# EAGLE board Schematic_withShiftResister (EAGLE 8.4.0)
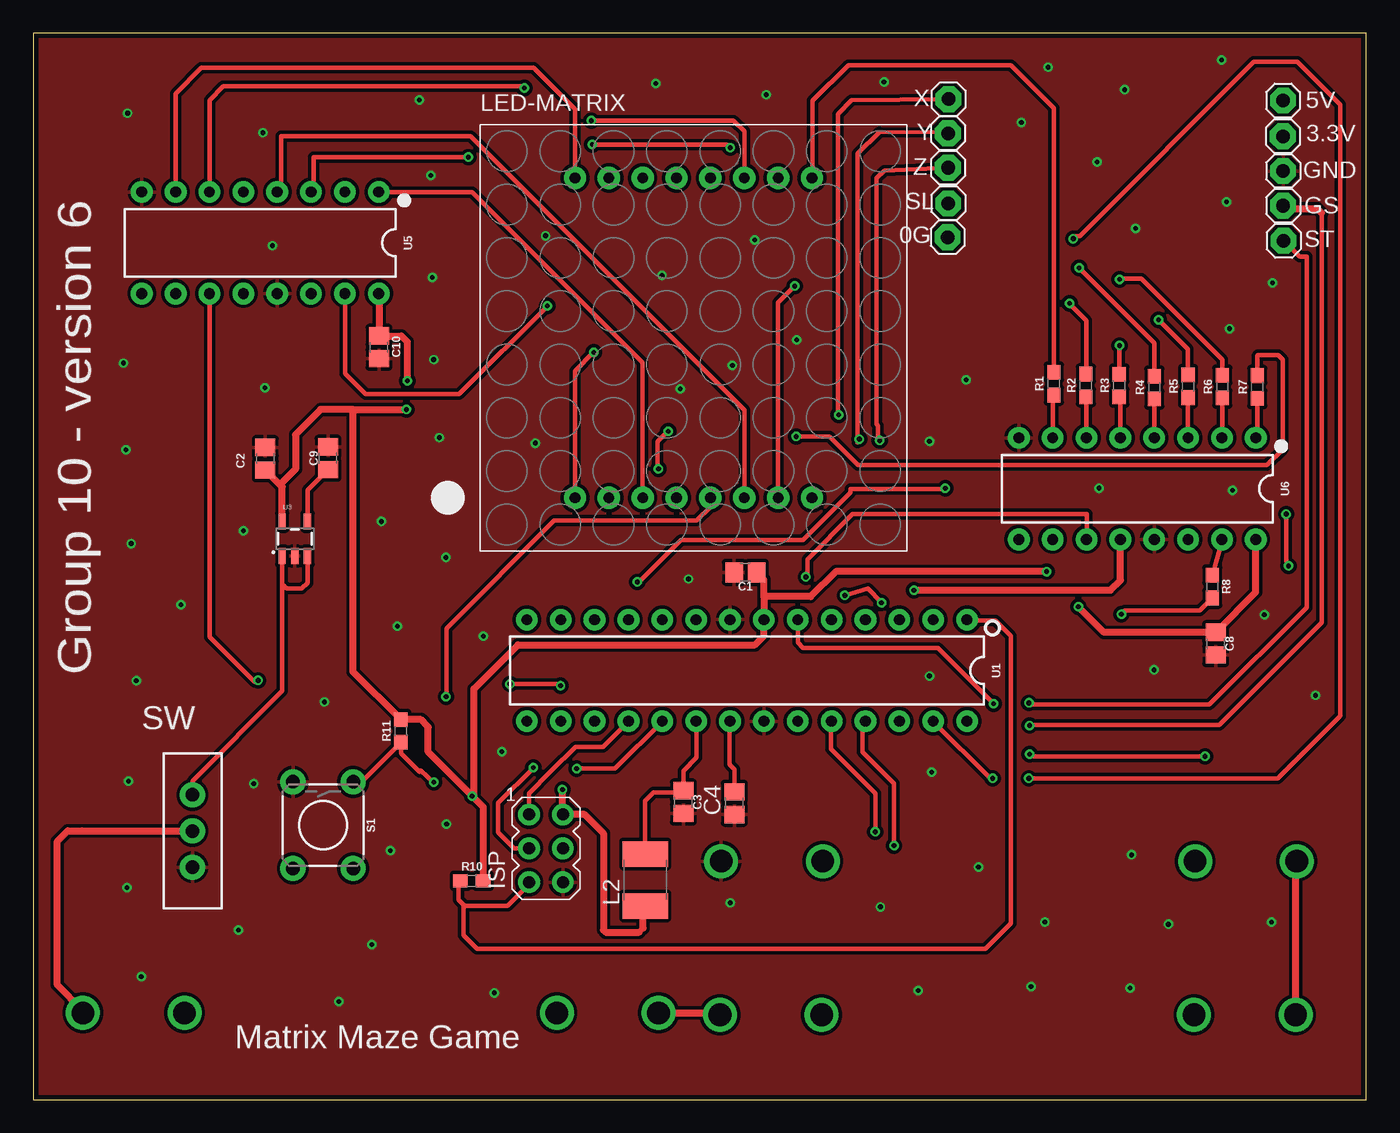
[diagram p0: board, top side]
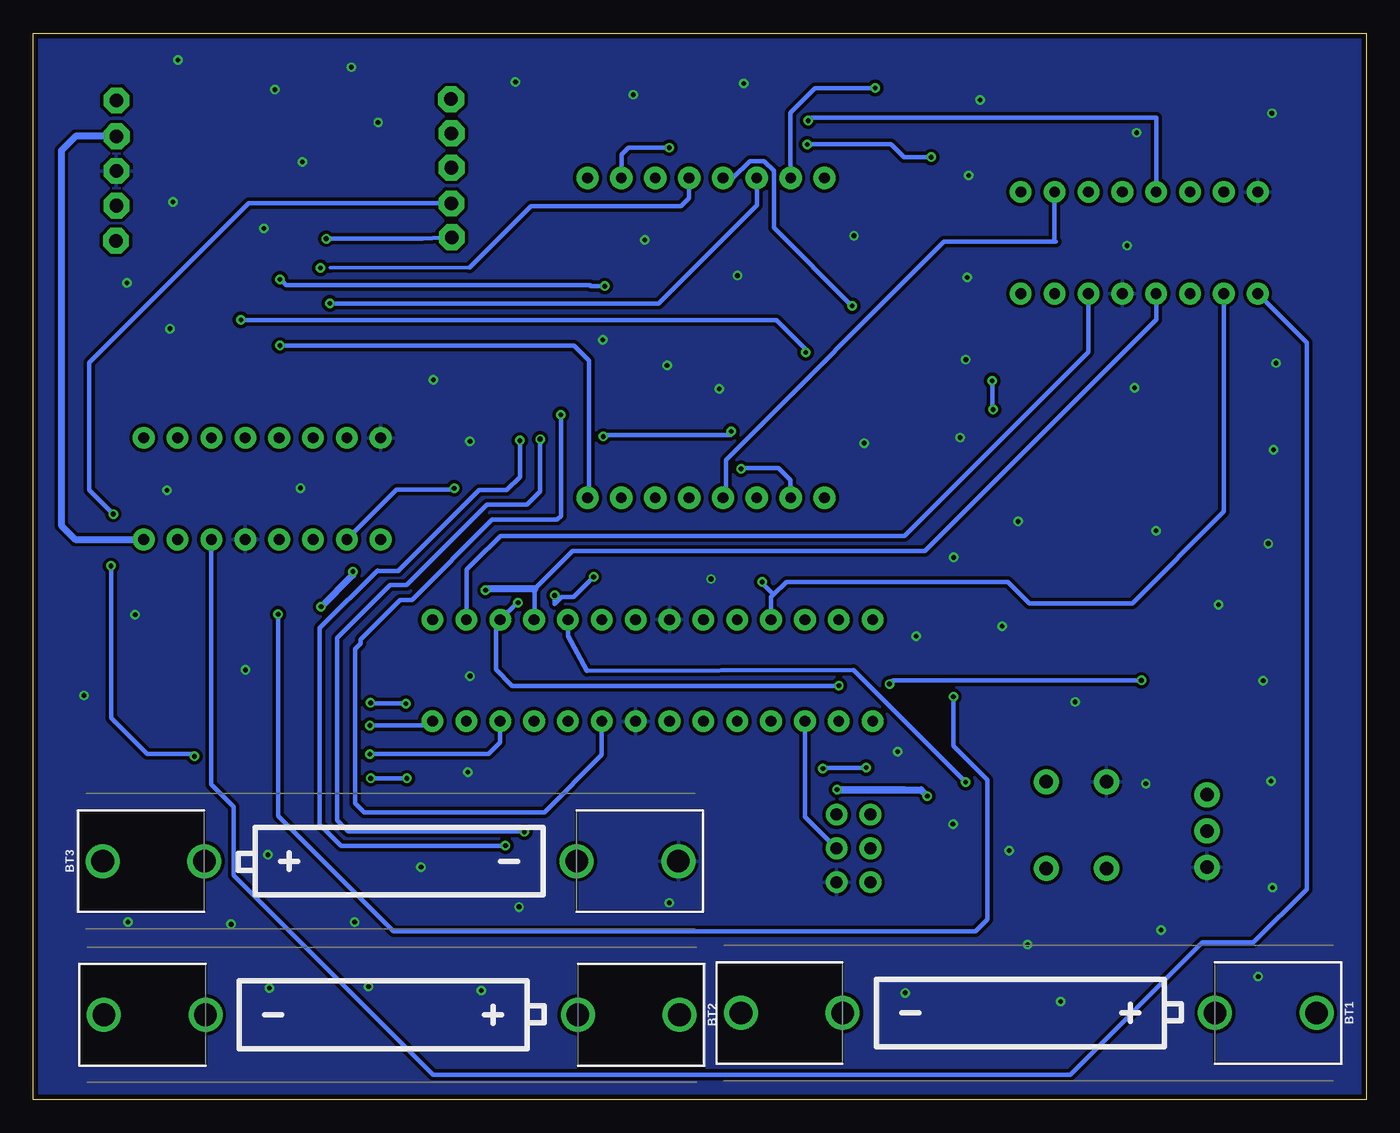
[diagram p1: board, bottom side, seen from below]

Size 100 x 80 mm. Coordinates in mm from the lower left corner, seen from the top.
Outline: 0,0 100,0 100,80 0,80 0,0
Copper layers (1*16): Top 0.0356mm / dielectric 1.5011mm / Bottom 0.0356mm
Design rules "osh-park-2-layers-design-rules": minimum track width 6mil, minimum drill 13mil, track to track 6mil, track to pad 6mil, pad to pad 6mil, via to via 6mil, smd to smd 6mil, copper to edge 15mil, drill to drill 6mil, minimum pad ring 7mil, minimum via ring 7mil, stop-mask expansion 3mil, vias tented up to drill 0mil, thermal gap 10mil
Net classes: 0 default: width 0.254 mm, drill 0.508 mm, clearance 0.254 mm

## Footprints (pad centres in the part's own frame; a part is rotated, then mirrored left to right if it is on the bottom)
1X01 = drill 1.016 pad 1.93 octagon: 1 0,0
BATTERY-AAA-KIT = drill 1.702: GND@1 21.59,0; GND@2 13.97,0; PWR@1 -21.59,0; PWR@2 -13.97,0
C0805 = smd 1.3 x 1.5: 1 -0.85,0; 2 0.85,0
AVRISP = drill 0.9 pad 1.626: 1 -1.27,2.54; 2 1.27,2.54; 3 -1.27,0; 4 1.27,0; 5 -1.27,-2.54; 6 1.27,-2.54
L1812 = smd 1.9 x 3.4: 1 -1.95,0; 2 1.95,0
SEGMENT_BL-M12A881UR = drill 0.8 pad 1.676: 1 -8.89,-12; 2 -6.35,-12; 3 -3.81,-12; 4 -1.27,-12; 5 1.27,-12; 6 3.81,-12; 7 6.35,-12; 8 8.89,-12; 9 8.89,12; 10 6.35,12; 11 3.81,12; 12 1.27,12; 13 -1.27,12; 14 -3.81,12; 15 -6.35,12; 16 -8.89,12
0603 = smd 1.1 x 1: 1 -0.85,0; 2 0.85,0
TACTILE_SWITCH_PTH_6.0MM = drill 1.016 pad 1.88: 1 -3.251,2.261; 2 3.251,2.261; 3 -3.251,-2.261; 4 3.251,-2.261
SWITCH-SPDT_LOCK.007S = drill 1.016 pad 1.88: 1 0,2.718; 2 0,0; 3 0,-2.718
DIP28 = drill 0.813 pad 1.626: 1 -16.51,-3.81; 2 -13.97,-3.81; 3 -11.43,-3.81; 4 -8.89,-3.81; 5 -6.35,-3.81; 6 -3.81,-3.81; 7 -1.27,-3.81; 8 1.27,-3.81; 9 3.81,-3.81; 10 6.35,-3.81; 11 8.89,-3.81; 12 11.43,-3.81; 13 13.97,-3.81; 14 16.51,-3.81; 15 16.51,3.81; 16 13.97,3.81; 17 11.43,3.81; 18 8.89,3.81; 19 6.35,3.81; 20 3.81,3.81; 21 1.27,3.81; 22 -1.27,3.81; 23 -3.81,3.81; 24 -6.35,3.81; 25 -8.89,3.81; 26 -11.43,3.81; 27 -13.97,3.81; 28 -16.51,3.81
SOT23-5 = smd 0.55 x 1.2: 1 -0.95,-1.3; 2 0,-1.3; 3 0.95,-1.3; 4 0.95,1.3; 5 -0.95,1.3
DIP16 = drill 0.813 pad 1.626: 1 -8.89,-3.81; 2 -6.35,-3.81; 3 -3.81,-3.81; 4 -1.27,-3.81; 5 1.27,-3.81; 6 3.81,-3.81; 7 6.35,-3.81; 8 8.89,-3.81; 9 8.89,3.81; 10 6.35,3.81; 11 3.81,3.81; 12 1.27,3.81; 13 -1.27,3.81; 14 -3.81,3.81; 15 -6.35,3.81; 16 -8.89,3.81

## Placement (x,y rotation side)
0G  [1X01]  68.6,64.7 0 top
3.3V  [1X01]  93.75,72.27 0 top
5V  [1X01]  93.76,74.95 0 top
BT1  [BATTERY-AAA-KIT]  25.31,6.5 180 bottom
BT2  [BATTERY-AAA-KIT]  73.11,6.36 180 bottom
BT3  [BATTERY-AAA-KIT]  73.2,17.89 0 bottom
C1  0.1uF  [C0805]  53.43,39.55 180 top
C2  2.2uF  [C0805]  17.41,48.08 90 top
C3  0.1uF  [C0805]  48.78,22.32 270 top
C4  0.1uF  [C0805]  52.6,22.23 90 top
C8  0.1uF  [C0805]  88.71,34.2 270 top
C9  470pF  [C0805]  22.11,48.12 90 top
C10  0.1uF  [C0805]  25.93,56.45 270 top
GND  [1X01]  93.77,69.67 0 top
GS  [1X01]  93.77,67.07 0 top
ISP  AVRISP-6  [AVRISP]  38.46,18.85 0 top
L2  10uH  [L1812]  45.91,16.47 90 top
LED-MATRIX  [SEGMENT_BL-M12A881UR]  49.53,57.15 0 top
R1  150  [0603]  76.56,53.71 90 top
R2  150  [0603]  78.96,53.58 90 top
R3  150  [0603]  81.47,53.57 90 top
R4  150  [0603]  84.11,53.42 90 top
R5  150  [0603]  86.64,53.52 90 top
R6  150  [0603]  89.21,53.49 90 top
R7  150  [0603]  91.83,53.46 90 top
R8  150  [0603]  88.45,38.48 270 top
R10  10k  [0603]  32.9,16.41 0 top
R11  10k  [0603]  27.58,27.65 90 top
S1  MOMENTARY-SWITCH-SPST-PTH-6.0MM  [TACTILE_SWITCH_PTH_6.0MM]  21.74,20.58 270 top
SL  [1X01]  68.65,67.24 0 top
ST  [1X01]  93.81,64.44 0 top
SW  [SWITCH-SPDT_LOCK.007S]  11.94,20.15 0 top
U1  328P  [DIP28]  53.54,32.19 180 top
U3  3.3V/150mA  [SOT23-5]  19.62,42.08 0 top
U5  SN74HC595N  [DIP16]  17.03,64.28 180 top
U6  SN74HC595N  [DIP16]  82.83,45.83 180 top
X  [1X01]  68.66,75.06 0 top
Y  [1X01]  68.62,72.5 0 top
Z  [1X01]  68.63,69.92 0 top

## Library data of the parts
0G 3.3V 5V C1-C4 C8-C10 GND GS SL ST X Y Z = adafruit
BT1-BT3 = SparkFun-Batteries; PROD_ID: BATT-08571; SF_SKU: PRT-12718
ISP LED-MATRIX = adafruit; OC_NEWARK: unknown
L2 = eagle-ltspice; OC_NEWARK: unknown; SPICEMODEL: NONE; SPICEPREFIX: L
R1-R8 = SparkFun-Resistors; PROD_ID: RES-11028
R10 R11 = SparkFun-Resistors; PROD_ID: RES-00824
S1 = SparkFun-Switches; OC_NEWARK: unknown; PROD_ID: SWCH-08441; SF_SKU: COM-00097
SW = SparkFun; OC_NEWARK: unknown
U1 = SparkFun-IC-Microcontroller; OC_NEWARK: unknown; PROD_ID: IC-09136
U3 = SparkFun-IC-Power; OC_NEWARK: unknown; PROD_ID: VREG-00822
U5 U6 = SparkFun-IC-Logic; PROD_ID: IC-13123

## Nets
3.3V: 3.3V.1 C1.1 C2.1 C8.1 C10.1 ISP.2 L2.1 R10.2 R11.2 U1.7 U3.5 U5.16 U6.16
GND: BT3.GND@1 C1.2 C2.2 C3.2 C4.1 C8.2 C9.2 C10.2 GND.1 ISP.6 S1.3 SW.3 U1.8 U1.22 U3.2 U5.8 U5.13 U6.8 U6.13
MISO: ISP.1 U1.18
MOSI: ISP.4 U1.17
N$1: LED-MATRIX.9 R1.2
N$2: LED-MATRIX.14 R2.2
N$3: LED-MATRIX.8 R3.2
N$4: LED-MATRIX.12
N$5: LED-MATRIX.1 R5.2
N$6: LED-MATRIX.7 R6.2
N$7: LED-MATRIX.2 R7.2
N$8: LED-MATRIX.5 R8.2
N$9: LED-MATRIX.13 U5.15
N$10: LED-MATRIX.4 U5.2
N$11: LED-MATRIX.10 U5.3
N$12: LED-MATRIX.6 U5.4
N$13: LED-MATRIX.11 U5.5
N$14: LED-MATRIX.15 U5.6
N$15: LED-MATRIX.16 U5.7
N$16: R8.1 U6.15
N$17: U1.23 X.1
N$18: U1.24 Y.1
N$19: U1.25 Z.1
N$20: R7.1 U6.1
N$21: R6.1 U6.2
N$22: R5.1 U6.3
N$23: R4.1 U6.4
N$24: R3.1 U6.5
N$25: R2.1 U6.6
N$26: R1.1 U6.7
N$27: LED-MATRIX.3 U5.1
N$28: U1.3 U5.11 U6.11
N$29: SW.1 U3.1 U3.3
N$30: BT2.GND@1 BT3.PWR@1
N$31: BT1.GND@1 BT2.PWR@1
N$32: C9.1 U3.4
N$33: U1.2 U5.14
N$34: U5.9 U6.14
N$35: U1.4 U5.12 U6.12
N$36: BT1.PWR@1 SW.2
N$37: C4.2 U1.21
N$38: U1.11 U5.10 U6.10
N$40: R11.1 S1.1 U1.5
N$41: SL.1 U1.26
N$42: 0G.1 U1.27
N$43: C3.1 L2.2 U1.20
N$45: GS.1 U1.28
N$46: ST.1 U1.6
RESET: ISP.5 R10.1 U1.1
S$1: R4.2
SCK: ISP.3 U1.19

## Tracks (layer width: path | path; a pad name or v marks a point on that pad's centre or on a via)
3.3V  (via drill 0.36)
  Top 0.356: 42.77,12.72 42.95,12.55 | 45.45,12.55 45.75,12.85 | 45.75,14.36 L2.1 | 18.64,46.27 18.37,46.27 | 54.81,39.02 54.43,39.4 C1.1
  Top 0.508: U5.16 C10.1 27.63,57.3 28.06,56.87 v28.06,53.93 | 91.91,41.84 U6.16 91.72,38.07 C8.1 80.32,35.05 v78.41,36.97 | 42.77,12.72 42.77,19.98 41.37,21.39 ISP.2 39.7,21.42 v39.7,23.24 39.7,23.34 | 42.95,12.55 45.45,12.55 | 45.75,12.85 45.75,14.36 | U3.5 18.67,45.97 18.37,46.27 C2.1 | 23.99,51.77 v27.98,51.77 | 23.99,51.77 21.55,51.77 19.67,49.89 19.67,47.31 18.64,46.27 | v32.93,22.77 33.75,21.95 R10.2 | v32.93,22.77 29.63,26.07 29.63,27.95 29.08,28.5 R11.2 23.99,32.09 23.99,51.77 | v32.93,22.77 33.06,22.91 33.06,30.82 36.35,34.11 54.13,34.11 54.81,34.79 U1.7 54.81,37.73 | 54.81,37.73 54.81,39.02 | 54.64,39.61 54.43,39.4 | v76.03,39.61 60.2,39.61 58.32,37.73 54.81,37.73
  Bottom 0.356: v28.06,53.93 28.06,51.66 27.98,51.73 v27.98,51.77
  Bottom 0.508: 34.62,23.24 v39.7,23.24 33.4,23.24 v32.93,22.77 | 3.3V.1 96.83,72.27 97.9,71.2 97.9,43.08 96.84,42.02 U6.16 | v78.41,36.97 76.03,39.35 v76.03,39.61
GND  (via drill 0.35)
  other vias: 6.77,55.26 6.96,48.74 7.34,41.71 7.72,31.43 7.15,23.89 7.02,15.91 15.38,12.71 16.53,23.7 21.83,29.83 27.32,35.52 26.11,43.37 17.36,53.4 15.77,42.67 17.94,64.07 17.23,72.54 7.08,74 29.82,69.35 28.97,75 29.93,61.69 30.04,55.52 30.46,49.67 30.94,40.67 33.76,34.77 31,20.66 35.14,26.1 52.3,14.76 25.41,11.62 63.56,14.45 75.89,13.3 85.16,13.15 92.9,13.3 96.19,30.32 92.36,36.38 92.97,61.29 89.53,67.34 81.87,75.77 69.99,54.01 52.45,55.08 47.17,61.82 54.14,64.51 54.98,75.39 46.71,76.23 74.13,73.32 49.16,39.06 37.67,49.25 48.54,53.32 38.43,64.81 84.09,32.24 82.4,18.36 67.39,24.57 67.24,31.78 57.28,56.99 74.85,8.46 82.3,8.37 66.39,8.19 34.59,8 22.91,7.36 89.14,78.01 82.71,65.35 79.95,45.88 89.99,45.72 89.76,57.84 70.91,17.43 8.1,9.22 11.09,37.13 26.79,18.67 79.8,70.35 76.15,77.46 63.82,76.35 67.24,49.39
  pour Top: -0.59,81.04 -0.59,-0.68 101.24,-0.68 101.08,81.13 -0.59,81.21 -0.61,81
  pour Bottom: -0.45,80.37 -0.36,0.06 100.12,0.1 100.03,80.22 -0.42,80.52 -0.42,80.1
MISO
  Top 0.356: ISP.1 37.19,22.98 38.82,24.6 | 38.82,24.6 | 38.82,24.6 40.68,26.46 42.73,26.46 U1.18
MOSI
  Bottom 0.356: U1.17 42.11,21.22 ISP.4
N$1
  Top 0.356: LED-MATRIX.9 58.47,69.2 58.47,74.95 61.14,77.61 73.33,77.61 76.56,74.38 R1.2
N$2  (via drill 0.36)
  Top 0.356: R2.2 79.01,54.48 79.01,58.44 77.75,59.7 v77.75,59.74
  Bottom 0.356: v77.75,59.74 53.1,59.74 45.72,67.12 LED-MATRIX.14
N$3  (via drill 0.36)
  Top 0.356: R3.2 81.47,56.55 v81.5,56.58
  Bottom 0.356: v81.5,56.58 59.43,56.58 58.3,55.45 58.3,45.27 LED-MATRIX.8
N$4
  Bottom 0.254: 67.28,62.4 77.72,62.4
  Bottom 0.356: LED-MATRIX.12 50.8,67.64 51.41,67.03 62.65,67.03 67.28,62.4
N$5  (via drill 0.36)
  Top 0.356: R5.2 86.64,56.29 v84.43,58.5 | v42.05,56.07 40.64,54.66 LED-MATRIX.1
  Bottom 0.356: v84.43,58.5 44.25,58.5 41.99,56.24 41.99,56.13 v42.05,56.07
N$6  (via drill 0.36)
  Top 0.356: R6.2 89.21,55.53 83.14,61.6 81.56,61.6 v81.5,61.55 | v57.12,61.04 55.88,59.8 LED-MATRIX.7
  Bottom 0.356: v81.5,61.55 81.05,61.09 58.24,61.09 58.19,61.04 v57.12,61.04
N$7  (via drill 0.36)
  Top 0.356: R7.2 91.83,55.79 91.88,55.84 93.41,55.84 93.75,55.51 93.75,48.78 92.56,47.6 61.86,47.6 59.71,49.74 v57.23,49.74 | v47.63,50.14 46.84,49.35 46.84,47.32 v46.9,47.32
  Bottom 0.356: v57.23,49.74 57.12,49.86 47.69,49.86 47.63,49.91 v47.63,50.14 | v46.9,47.32 46.84,47.37 44.08,47.37 43.18,46.48 LED-MATRIX.2
N$8  (via drill 0.36)
  Top 0.356: R8.2 87.5,36.68 81.91,36.68 v81.64,36.41 | v30.96,30.22 31,30.26 31,35.35 39.07,43.42 49.77,43.42 50.8,44.45 LED-MATRIX.5
  Bottom 0.356: v81.64,36.41 81.64,21.28 72.97,12.62 29.32,12.62 28.41,13.52 28.41,23.99 30.96,26.53 v30.96,30.22
N$9  (via drill 0.36)
  Top 0.356: v38.56,59.54 31.94,52.92 24.93,52.92 23.38,54.47 U5.15
  Bottom 0.356: v38.56,59.54 44.45,65.43 44.45,69.68 45.19,70.42 46.25,70.42 47.52,69.15 LED-MATRIX.13
N$10
  Bottom 0.356: U5.2 23.38,64.46 23.28,64.36 31.66,64.36 48.05,47.98 48.05,45.36 LED-MATRIX.4
N$11  (via drill 0.36)
  Top 0.356: U5.3 21.05,68.3 21.05,70.71 v32.65,70.71 | v41.93,71.65 52.05,71.65 v52.28,71.42
  Bottom 0.356: v32.65,70.71 34.68,70.71 35.66,71.69 41.9,71.69 v41.93,71.65 | v52.28,71.42 55.34,71.42 55.88,70.88 LED-MATRIX.10
N$12
  Top 0.356: U5.4 18.58,68.37 18.58,72.28 32.8,72.28 53.34,51.74 LED-MATRIX.6
N$13  (via drill 0.36)
  Top 0.356: v41.86,73.45 52.54,73.45 53.34,72.64 LED-MATRIX.11
  Bottom 0.356: U5.5 | U5.5 15.76,73.68 41.63,73.68 v41.86,73.45
N$14  (via drill 0.36)
  Top 0.356: U5.6 13.22,75 14.25,76.03 36.69,76.03 v36.83,75.89
  Bottom 0.356: v36.83,75.89 41.34,75.89 43.18,74.06 LED-MATRIX.15
N$15
  Top 0.356: U5.7 10.68,75.48 12.6,77.41 37.54,77.41 40.64,74.31 LED-MATRIX.16
N$16
  Top 0.356: U6.15 89.2,42 R8.1
N$17  (via drill 0.36)
  Top 0.356: v60.42,51.38 60.35,51.45 60.35,73.95 61.37,74.97 X.1
  Bottom 0.356: v60.42,51.38 60.42,43.79 60.69,43.52 65.57,43.52 71.6,37.48 72.47,37.48 75.45,34.5 75.45,34.23 75.86,33.82 75.86,22.23 75.18,21.55 61.64,21.55 57.35,25.84 U1.23
N$18  (via drill 0.36)
  Top 0.254: 63.47,72.59 68.53,72.59 Y.1
  Top 0.356: 63.47,72.59 61.84,70.97 61.84,49.28 61.98,49.41 v61.98,49.55 | v63.17,20.09 63.17,22.96 59.83,26.3 59.83,28.32 U1.24
  Bottom 0.356: v61.98,49.55 61.98,45.62 62.95,44.64 65.97,44.64 72.01,38.6 73.22,38.6 77.2,34.62 77.2,20.95 76.39,20.14 63.22,20.14 v63.17,20.09
N$19  (via drill 0.36)
  Top 0.356: Z.1 63.84,69.7 63.26,69.12 63.26,50.67 63.36,50.58 63.36,49.59 v63.5,49.45 | v64.57,19.05 64.57,23.72 62.2,26.1 62.2,28.15 U1.25
  Bottom 0.356: v63.5,49.45 63.5,46.72 64.49,45.73 66.56,45.73 72.58,39.71 72.58,39.66 74.13,39.66 74.17,39.71 78.5,35.38 78.5,20.64 76.9,19.05 v64.57,19.05
N$20
  Top 0.356: U6.1 91.83,49.75 R7.1
N$21
  Top 0.356: U6.2 89.21,49.68 R6.1
N$22
  Top 0.356: U6.3 R5.1
N$23
  Top 0.356: U6.4 84.11,49.66 R4.1
N$24
  Top 0.356: R3.1 81.56,52.64 U6.5
N$25
  Top 0.254: 79.02,52.68 R2.1
  Top 0.356: U6.6 79.02,52.68
N$26
  Top 0.254: 76.48,52.78 R1.1
  Top 0.356: U6.7 76.48,52.78
N$27
  Top 0.356: U5.1 32.91,68.09 45.72,55.29 LED-MATRIX.3
N$28  (via drill 0.36)
  Top 0.356: U5.11 13.22,34.69 16.59,31.32 16.73,31.32 v16.87,31.45 | v35.76,31.18 39.42,31.18 v39.56,31.04 | v63.64,37.27 62.63,38.34 v60.89,37.82 | U6.11 79.03,42.04 79.03,43.91 61.46,43.91 58.08,40.53 58.08,39.32 v57.97,39.21
  Bottom 0.356: v16.87,31.45 35.49,31.45 v35.76,31.18 | v35.76,31.18 | v39.56,31.04 64.08,31.04 65.3,32.26 65.3,35.68 U1.3 63.71,37.27 v63.64,37.27 | v57.97,39.21 59.48,37.7 60.36,37.7 60.89,37.2 v60.89,37.82
N$29
  Top 0.356: 18.67,38.66 U3.1 | 18.67,38.66 18.67,30.66 11.94,23.92 SW.1 | U3.3 20.57,38.76 20.15,38.34 19,38.34 18.67,38.66
N$30
  Top 0.508: BT2.GND@1 94.7,17.8 BT3.PWR@1
N$31
  Top 0.508: BT1.GND@1 51.38,6.5 BT2.PWR@1
N$32
  Top 0.356: U3.4 20.57,45.73 C9.1
N$33
  Bottom 0.356: U5.14 20.84,56.1 34.64,42.3 64.96,42.3 66.94,40.32 | 66.94,40.32 | 66.94,40.32 67.5,39.75 67.5,36.01 U1.2
N$34
  Bottom 0.356: U5.9 4.47,56.81 4.47,15.79 8.46,11.8 12.28,11.8 22.21,1.86 70,1.86 84.96,16.82 84.96,21.96 86.64,23.64 U6.14
N$35  (via drill 0.36)
  Top 0.508: v66.08,38.21 80.81,38.21 81.56,38.96 U6.12
  Bottom 0.356: U5.12 15.76,58.51 33.12,41.14 59.54,41.14 62.38,38.3 62.38,36.05 U1.4
  Bottom 0.508: 62.38,38.3 65.99,38.3 v66.08,38.21
N$36
  Top 0.508: BT1.PWR@1 3.72,6.67 1.8,8.6 1.8,19.38 2.58,20.17 3.66,20.17 SW.2
N$37
  Top 0.356: C4.2 52.6,24.77 52.22,25.14 52.22,28.33 U1.21
N$38  (via drill 0.36)
  Top 0.356: v68.43,45.85 68.39,45.82 61.3,45.82 61.3,45.54 57.73,41.98 48.6,41.98 45.38,38.76 45.34,38.76 45.34,38.8 v45.3,38.84
  Bottom 0.356: U5.10 10.68,44.11 17.56,37.23 25.28,37.23 26.89,38.84 43.5,38.84 44.46,37.88 | 44.46,37.88 44.65,37.69 U1.11 | U6.10 72.73,45.78 68.74,45.78 68.66,45.85 v68.43,45.85 | v45.3,38.84 45.3,38.72 44.46,37.88
N$40  (via drill 0.36)
  Top 0.356: 24.61,23.83 R11.1 27.58,25.98 28.97,24.59 29.07,24.69 v30.05,23.81
  Top 0.508: 24.61,23.83 S1.1
  Bottom 0.356: v30.05,23.81 38.47,32.23 58.46,32.17 59.89,34.78 U1.5
N$41  (via drill 0.36)
  Top 0.356: v94,43.93 94,40.37 94.28,40.09 94.23,40.09 v94.17,40.03 | v87.9,25.75 74.92,25.75 v74.75,25.92
  Bottom 0.356: SL.1 83.84,67.24 95.81,55.28 95.81,45.74 v94,43.93 | v94.17,40.03 94.17,28.63 91.46,25.92 88.07,25.92 v87.9,25.75 | v74.75,25.92 65.83,25.92 64.97,26.78 U1.26
N$42  (via drill 0.36)
  Top 0.356: U1.27 71.79,24.1 v71.98,24.1 | v74.69,24.1 v74.7,24.11 93.38,24.11 98.07,28.8 98.07,74.64 94.83,77.88 91.58,77.88 78.5,64.8 78.23,64.8 v78.03,64.59
  Bottom 0.356: v71.98,24.1 v74.69,24.1 | v78.03,64.59 70.79,64.59 0G.1
N$43
  Top 0.356: U1.20 49.77,28.34 49.77,25.67 48.77,24.67 C3.1 48.66,23.05 46.54,23.05 45.91,22.42 L2.2
N$45  (via drill 0.36)
  Top 0.356: 96.66,66.52 96.66,35.8 88.98,28.12 74.81,28.12
  Top 0.508: GS.1 93.98,66.85 96.32,66.85 96.66,66.52 | 74.81,28.12 v74.75,28.06
  Bottom 0.356: v74.75,28.06 70.37,28.06
  Bottom 0.508: 70.37,28.06 U1.28
N$46  (via drill 0.36)
  Top 0.356: ST.1 95,63.24 95.53,63.24 95.53,36.93 88.25,29.64 74.81,29.64 v74.7,29.76 | v72.04,29.7 67.86,33.88 57.76,33.88 57.35,34.29 U1.6
  Bottom 0.356: v74.7,29.76 74.64,29.7 v72.04,29.7
RESET
  Top 0.356: R10.1 31.91,16.27 31.91,14.97 32.29,14.6 | 32.29,14.6 32.35,14.53 35.58,14.53 37.19,16.14 ISP.5 | U1.1 70.11,35.95 72.17,35.95 73.34,34.77 73.34,13.22 71.42,11.29 33.31,11.29 32.29,12.31 32.29,14.6
S$1  (via drill 0.36)
  Top 0.356: v78.46,62.4 84.11,56.75 R4.2
  Bottom 0.356: 78.34,62.4 78.38,62.36 78.42,62.4 v78.46,62.4
SCK  (via drill 0.36)
  Top 0.356: ISP.3 36.09,18.85 34.87,20.06 34.87,22.25 v37.52,24.89 | v40.76,24.83 43.64,24.83 U1.19
  Bottom 0.356: v37.52,24.89 40.7,24.89 v40.76,24.83

## Text on the board
tPlace: Group 10 - version 6 | Matrix Maze Game